# EAGLE board ecu1_telemetria (EAGLE 9.0.0)
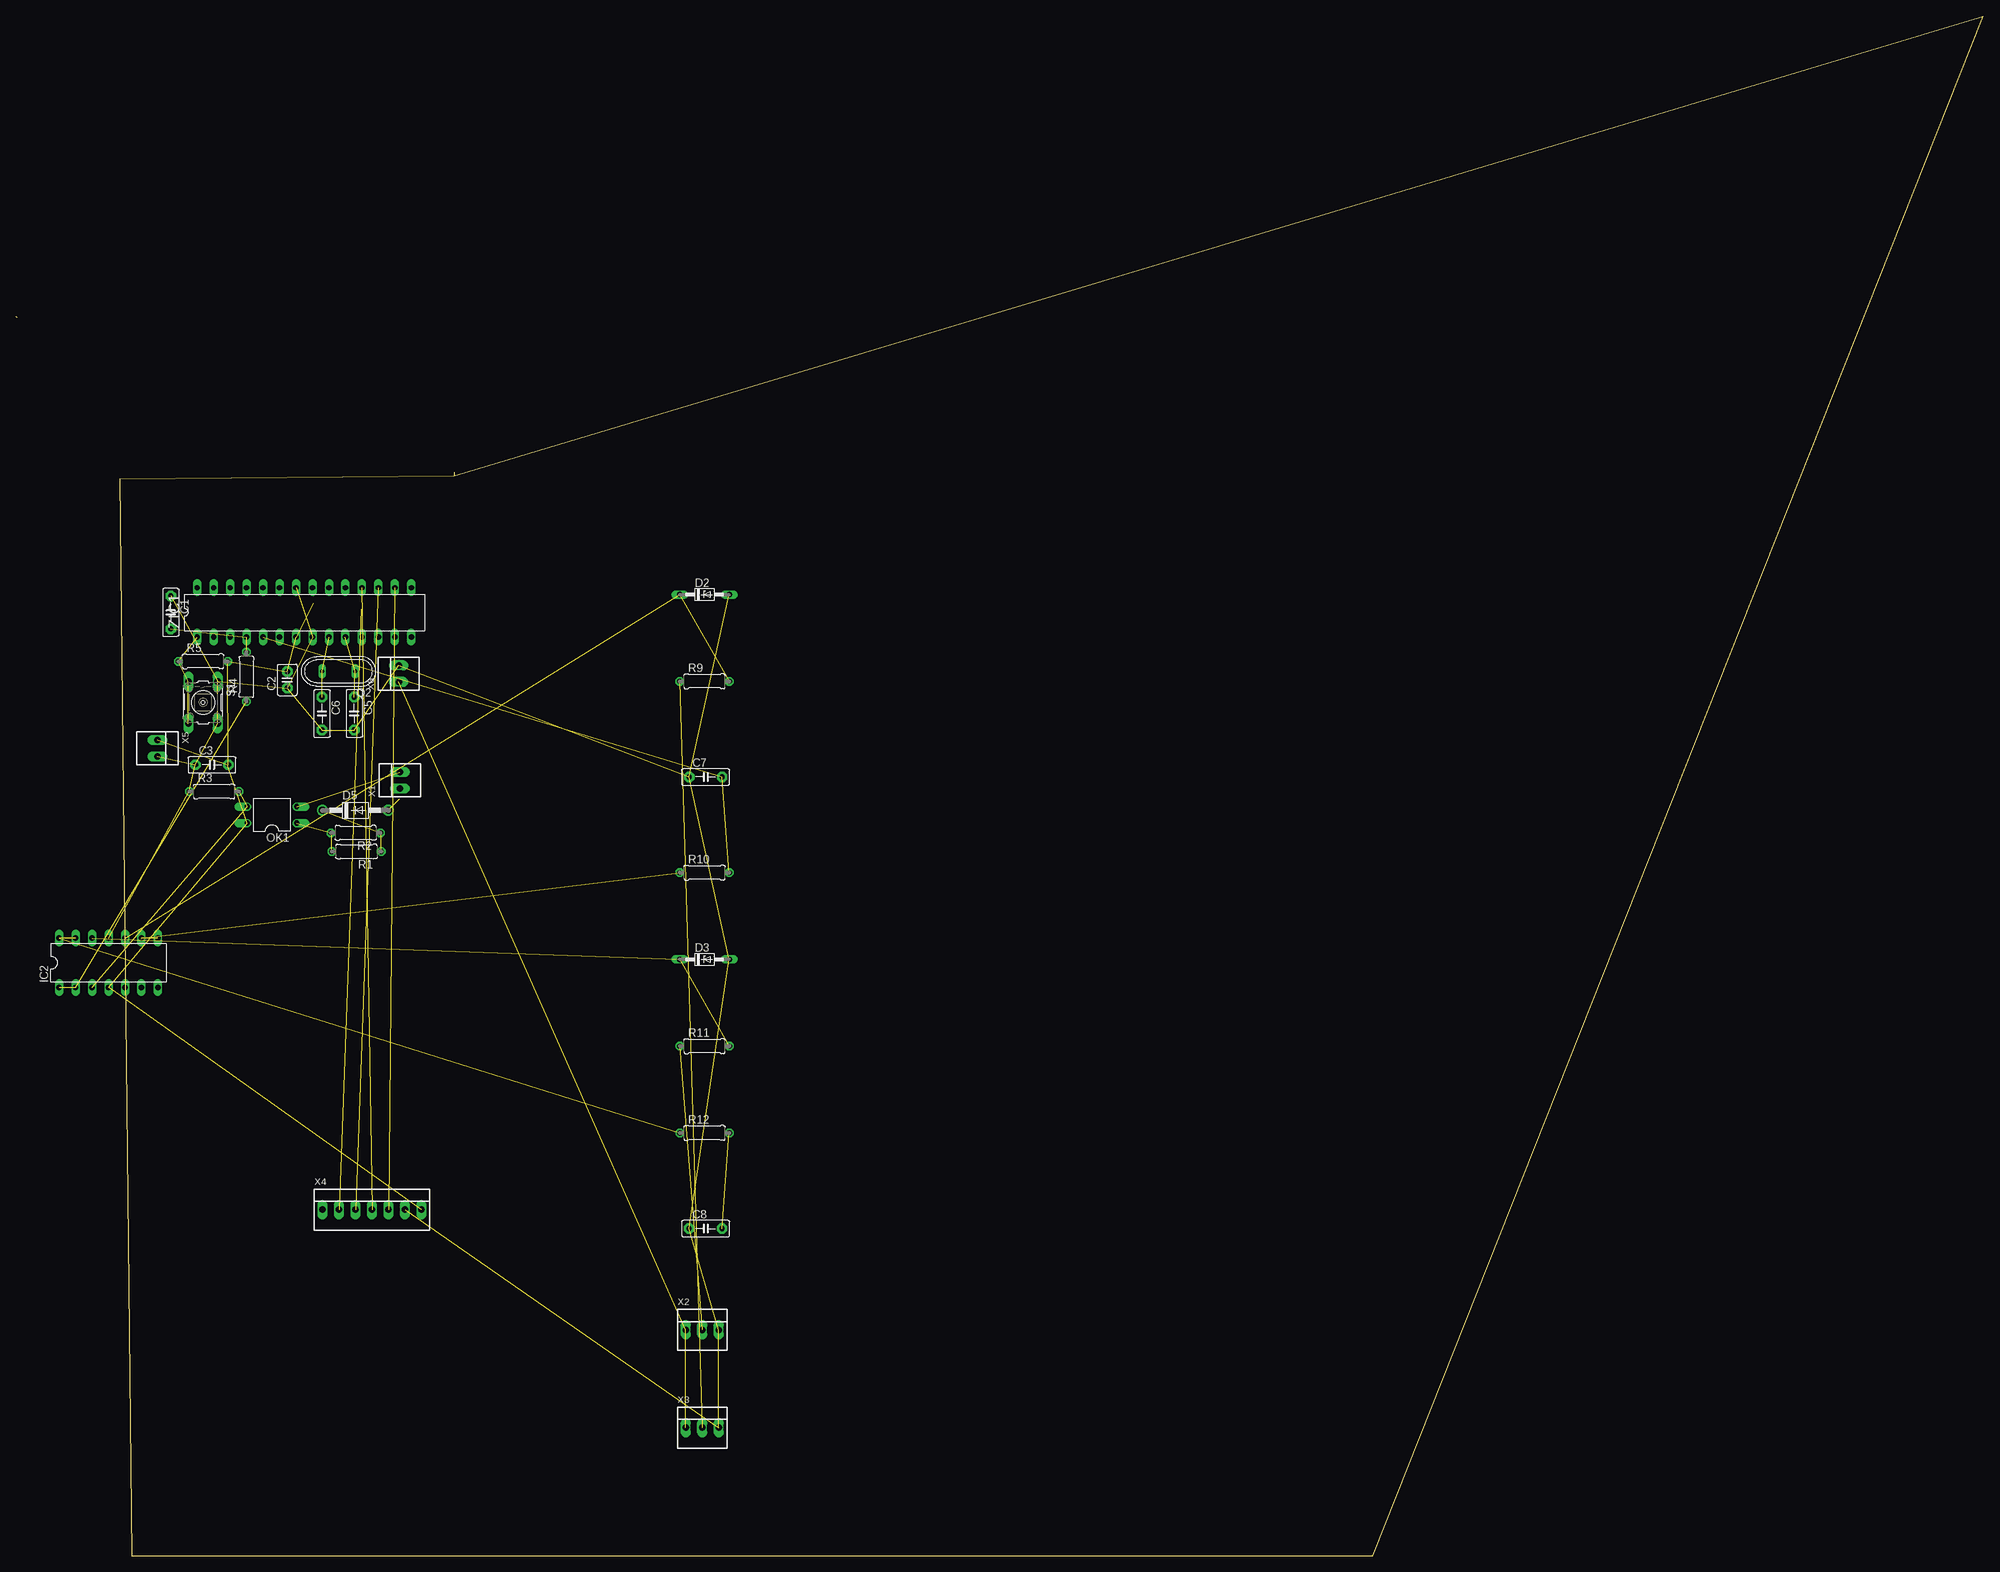
[diagram p0: board, top side]
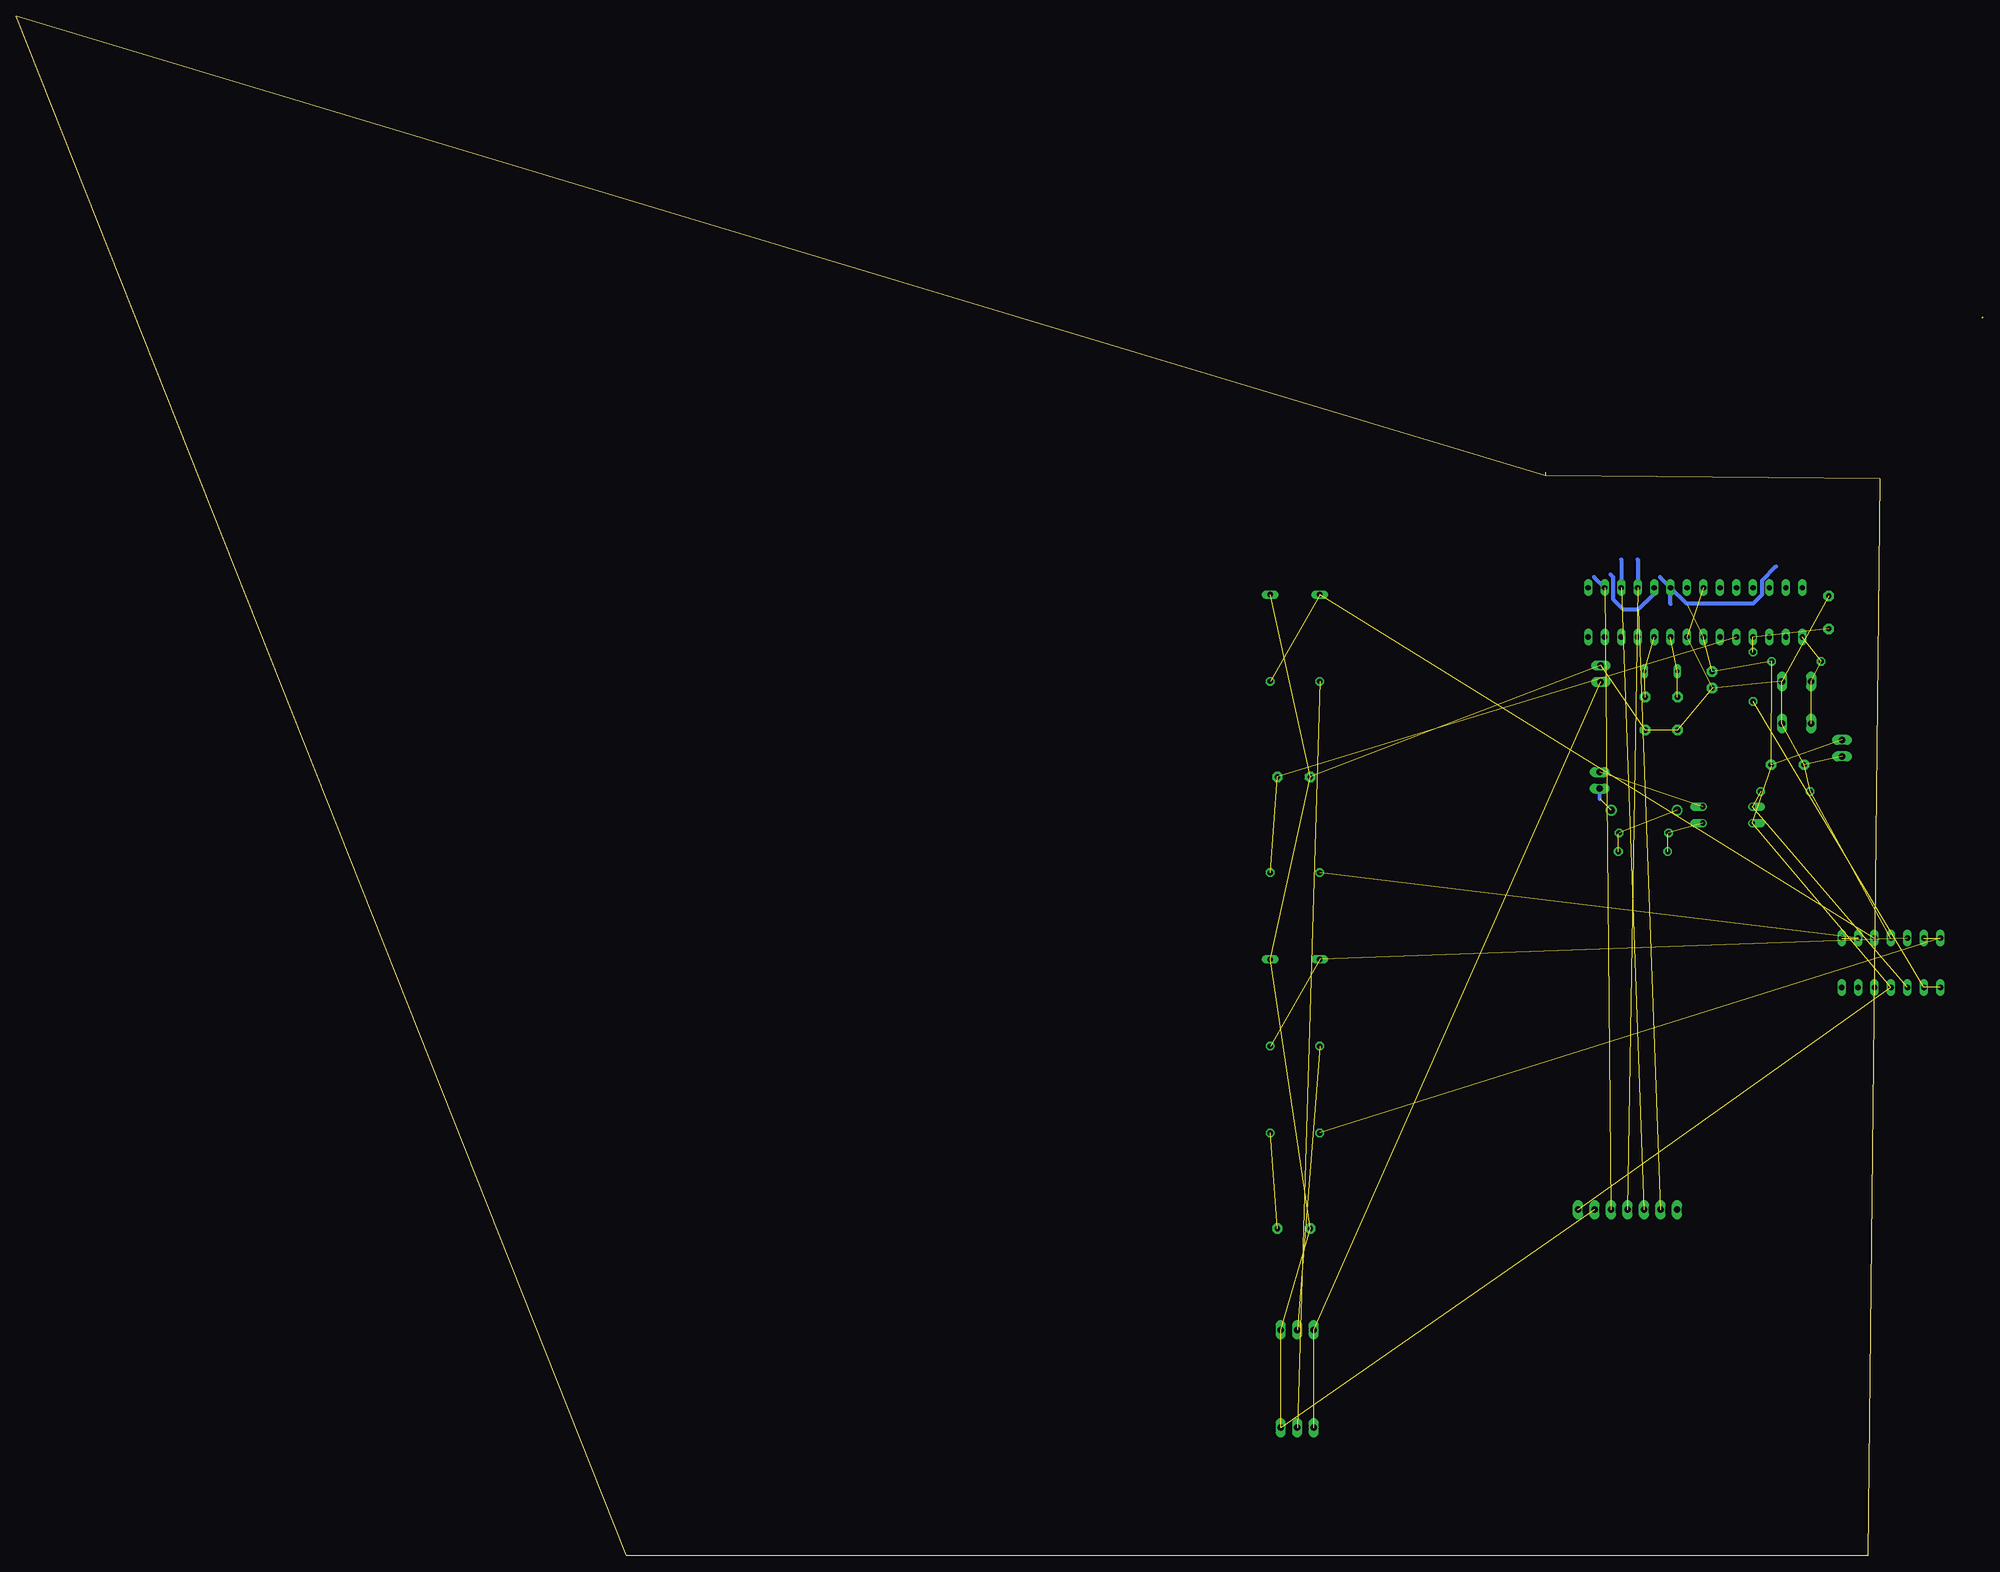
[diagram p1: board, bottom side, seen from below]

Size 303.3 x 237.29 mm. Coordinates in mm from the lower left corner, seen from the top.
Outline: 67.55,166.48 15.95,165.96 17.83,0 209.17,0 303.3,237.29 67.55,166.48
Outline: 67.55,166.99 67.55,166.48
Outline: 0.17,190.82 0,190.99
Copper layers (1*16): Top 0.035mm / dielectric 1.5mm / Bottom 0.035mm
Design rules "default": minimum track width 6mil, minimum drill 0.35mm, track to track 6mil, track to pad 6mil, pad to pad 6mil, via to via 6mil, smd to smd 6mil, copper to edge 40mil, drill to drill 6mil, minimum pad ring 10mil, minimum via ring 8mil, stop-mask expansion 4mil, vias tented up to drill 0mil, thermal gap 10mil

## Footprints (pad centres in the part's own frame; a part is rotated, then mirrored left to right if it is on the bottom)
C5B2.5 = drill 0.813 pad 1.6 octagon: 1 -2.54,0; 2 2.54,0
C2.5-3 = drill 0.813 pad 1.6 octagon: 1 -1.27,0; 2 1.27,0
DO34Z7 = drill 0.813 long: A 3.81,0; C -3.81,0
DO41-10 = drill 1.118: A 5.08,0; C -5.08,0
DIL14 = drill 0.813 long: 1 -7.62,-3.81; 2 -5.08,-3.81; 3 -2.54,-3.81; 4 0,-3.81; 5 2.54,-3.81; 6 5.08,-3.81; 7 7.62,-3.81; 8 7.62,3.81; 9 5.08,3.81; 10 2.54,3.81; 11 0,3.81; 12 -2.54,3.81; 13 -5.08,3.81; 14 -7.62,3.81
DIL04 = drill 0.813 offset: 1 -1.27,-3.81; 2 1.27,-3.81; 3 1.27,3.81; 4 -1.27,3.81
QS = drill 0.61 long: 1 -2.54,0; 2 2.54,0
0207/7 = drill 0.813 octagon: 1 -3.81,0; 2 3.81,0
B3F-10XX = drill 1.016 long: 1 -3.251,2.261; 2 3.251,2.261; 3 -3.251,-2.261; 4 3.251,-2.261
22-23-2021 = drill 1 long: 1 -1.27,0; 2 1.27,0
22-23-2031 = drill 1 long: 1 -2.54,0; 2 0,0; 3 2.54,0
22-23-2071 = drill 1 long: 1 -7.62,0; 2 -5.08,0; 3 -2.54,0; 4 0,0; 5 2.54,0; 6 5.08,0; 7 7.62,0
DIL28-3 = drill 0.813 long: 1 -16.51,-3.81; 2 -13.97,-3.81; 3 -11.43,-3.81; 4 -8.89,-3.81; 5 -6.35,-3.81; 6 -3.81,-3.81; 7 -1.27,-3.81; 8 1.27,-3.81; 9 3.81,-3.81; 10 6.35,-3.81; 11 8.89,-3.81; 12 11.43,-3.81; 13 13.97,-3.81; 14 16.51,-3.81; 15 16.51,3.81; 16 13.97,3.81; 17 11.43,3.81; 18 8.89,3.81; 19 6.35,3.81; 20 3.81,3.81; 21 1.27,3.81; 22 -1.27,3.81; 23 -3.81,3.81; 24 -6.35,3.81; 25 -8.89,3.81; 26 -11.43,3.81; 27 -13.97,3.81; 28 -16.51,3.81

## Placement (x,y rotation side)
C1  100nF  [C5B2.5]  23.83,145.39 270 top
C2  100nF  [C2.5-3]  41.81,134.99 90 top
C3  100nF  [C5B2.5]  30.18,121.9 0 top
C5  22pF  [C5B2.5]  52.12,129.79 270 top
C6  22pF  [C5B2.5]  47.15,129.79 270 top
C7  100nF  [C5B2.5]  106.3,120.02 0 top
C8  100nF  [C5B2.5]  106.3,50.41 0 top
D2  5.0V  [DO34Z7]  106.13,148.13 0 top
D3  5.0V  [DO34Z7]  106.13,91.9 0 top
D5  1N4004  [DO41-10]  52.29,114.87 0 top
IC2  LM324N  [DIL14]  14.23,91.38 0 top
OK1  PC817  [DIL04]  39.43,114.19 90 top
Q2  16MHz  [QS]  49.72,136.3 180 top
R1  1k  [0207/7]  52.46,108.53 180 top
R2  1k  [0207/7]  52.34,111.41 180 top
R3  10k  [0207/7]  30.52,117.79 0 top
R4  1k  [0207/7]  35.49,135.45 90 top
R5  10k  [0207/7]  28.8,137.85 0 top
R9  4.7KR  [0207/7]  106.13,134.76 0 top
R10  1k  [0207/7]  106.13,105.27 0 top
R11  4.7KR  [0207/7]  106.13,78.52 0 top
R12  1k  [0207/7]  106.13,65.15 0 top
S1  [B3F-10XX]  28.8,131.5 270 top
X1  22-23-2021  [22-23-2021]  59.15,119.5 90 top
X2  22-23-2031  [22-23-2031]  105.78,34.8 0 top
X3  22-23-2031  [22-23-2031]  105.78,19.72 0 top
X4  22-23-2071  [22-23-2071]  54.86,53.32 0 top
X5  22-23-2021  [22-23-2021]  21.77,124.47 270 top
X6  22-23-2021  [22-23-2021]  58.98,135.96 90 top
ZIC1  ATMEGA8  [DIL28-3]  44.41,145.39 0 top

## Library data of the parts
C1-C3 C5-C8 = capacitor-wima
D2 D3 D5 = diode
IC2 = linear
OK1 = optocoupler; MPN: PC817X4J000F; OC_FARNELL: 9707727; OC_NEWARK: 97K7059
Q2 = special
R1-R5 R9-R12 = resistor
S1 = switch-omron; MPN: B3F-1000; OC_FARNELL: 176432; OC_NEWARK: 36M3542
X1 X5 X6 = con-molex; MF: MOLEX; MPN: 22-23-2021; OC_FARNELL: 1462926; OC_NEWARK: 25C3832
X2 X3 = con-molex; MF: MOLEX; MPN: 22-23-2031; OC_FARNELL: 1462950; OC_NEWARK: 30C0862
X4 = con-molex; MF: MOLEX; MPN: 22-23-2071; OC_FARNELL: 1654534; OC_NEWARK: 56H0445
ZIC1 = atmel

## Nets
+5V: C2.2 C3.2 IC2.4 OK1.4 R5.2 X4.7 X5.1 ZIC1.7 ZIC1.20
+12V: X2.1 X3.1 X6.1
COMB1_IN: R9.1 X3.2
COMB1_OUT: C7.2 R10.2 ZIC1.5
COMB2_IN: R11.1 X2.2
COMB2_OUT: C8.2 R12.2
GND: C1.1 C2.1 C3.1 C5.2 C6.2 C7.1 C8.1 D2.A D3.A IC2.11 R3.1 S1.1 S1.2 X2.3 X3.3 X4.6 X5.2 X6.2 ZIC1.8 ZIC1.22
MISO: X4.4 ZIC1.18
MOSI: X4.3 ZIC1.17
N$1: OK1.1 R1.2 R2.2
N$2: D5.C R1.1 R2.1
N$3: IC2.1 IC2.2 R4.1
N$5: D2.C IC2.10 R9.2
N$7: IC2.3 OK1.3 R3.2
N$9: R5.1 S1.3 S1.4 ZIC1.1
N$12: IC2.8 IC2.9 R10.1
N$13: D3.C IC2.12 R11.2
N$14: IC2.13 IC2.14 R12.1
RPM_GND: OK1.2 X1.2
RPM_IN: D5.A X1.1
RPM_OUT: C1.2 R4.2 ZIC1.4
SCK: X4.2 ZIC1.19
SS: X4.5 ZIC1.16
XTAL1: C6.1 Q2.2 ZIC1.9
XTAL2: C5.1 Q2.1 ZIC1.10

## Tracks (layer width: path | path; a pad name or v marks a point on that pad's centre or on a via)
+5V  (9 unrouted)
  Bottom 0.61: 32.58,121.76 32.58,121.88 | 48.22,146.66 ZIC1.20 | ZIC1.20 45.78,146.76 35.49,146.76 34.09,148.16 34.09,150.32 31.95,152.46 | ZIC1.20 49.85,150.84
+12V  (2 unrouted)
COMB1_IN  (1 unrouted)
COMB1_OUT  (2 unrouted)
COMB2_IN  (1 unrouted)
COMB2_OUT  (1 unrouted)
GND  (19 unrouted)
MISO  (1 unrouted)
  Bottom 0.61: 53.3,153.57 ZIC1.18
MOSI  (1 unrouted)
  Bottom 0.61: 55.84,153.57 ZIC1.17
N$1  (2 unrouted)
  Bottom 0.61: 48.65,111.28 R2.2
N$2  (2 unrouted)
  Bottom 0.61: R2.1 56.27,111.28 56.27,111.4
N$3  (2 unrouted)
N$5  (2 unrouted)
N$7  (2 unrouted)
N$9  (3 unrouted)
N$12  (2 unrouted)
N$13  (2 unrouted)
N$14  (2 unrouted)
RPM_GND  (1 unrouted)
RPM_IN  (1 unrouted)
  Bottom 0.61: 59.15,116.65 X1.1
RPM_OUT  (2 unrouted)
  Bottom 0.61: 35.52,139.28 R4.2
SCK  (1 unrouted)
  Bottom 0.61: 57.47,151.26 57.09,150.88 57.09,147.45 55.55,145.9 53.15,145.9 50.76,148.3 ZIC1.19
SS  (1 unrouted)
  Bottom 0.61: 60.01,150.84 ZIC1.16
XTAL1  (2 unrouted)
XTAL2  (2 unrouted)